# Altium PCB RF-36-S1 V2.PcbDoc
Units mm, origin at the board's own origin, x right, y up, seen from the top; angles counter-clockwise.
Board outline 80 x 80.71 mm, 2 copper layers (Top Layer, Bottom Layer); 70 components, 55 nets, 215 pads, 24 vias.
Unrouted connection lines stored in the file: 4.
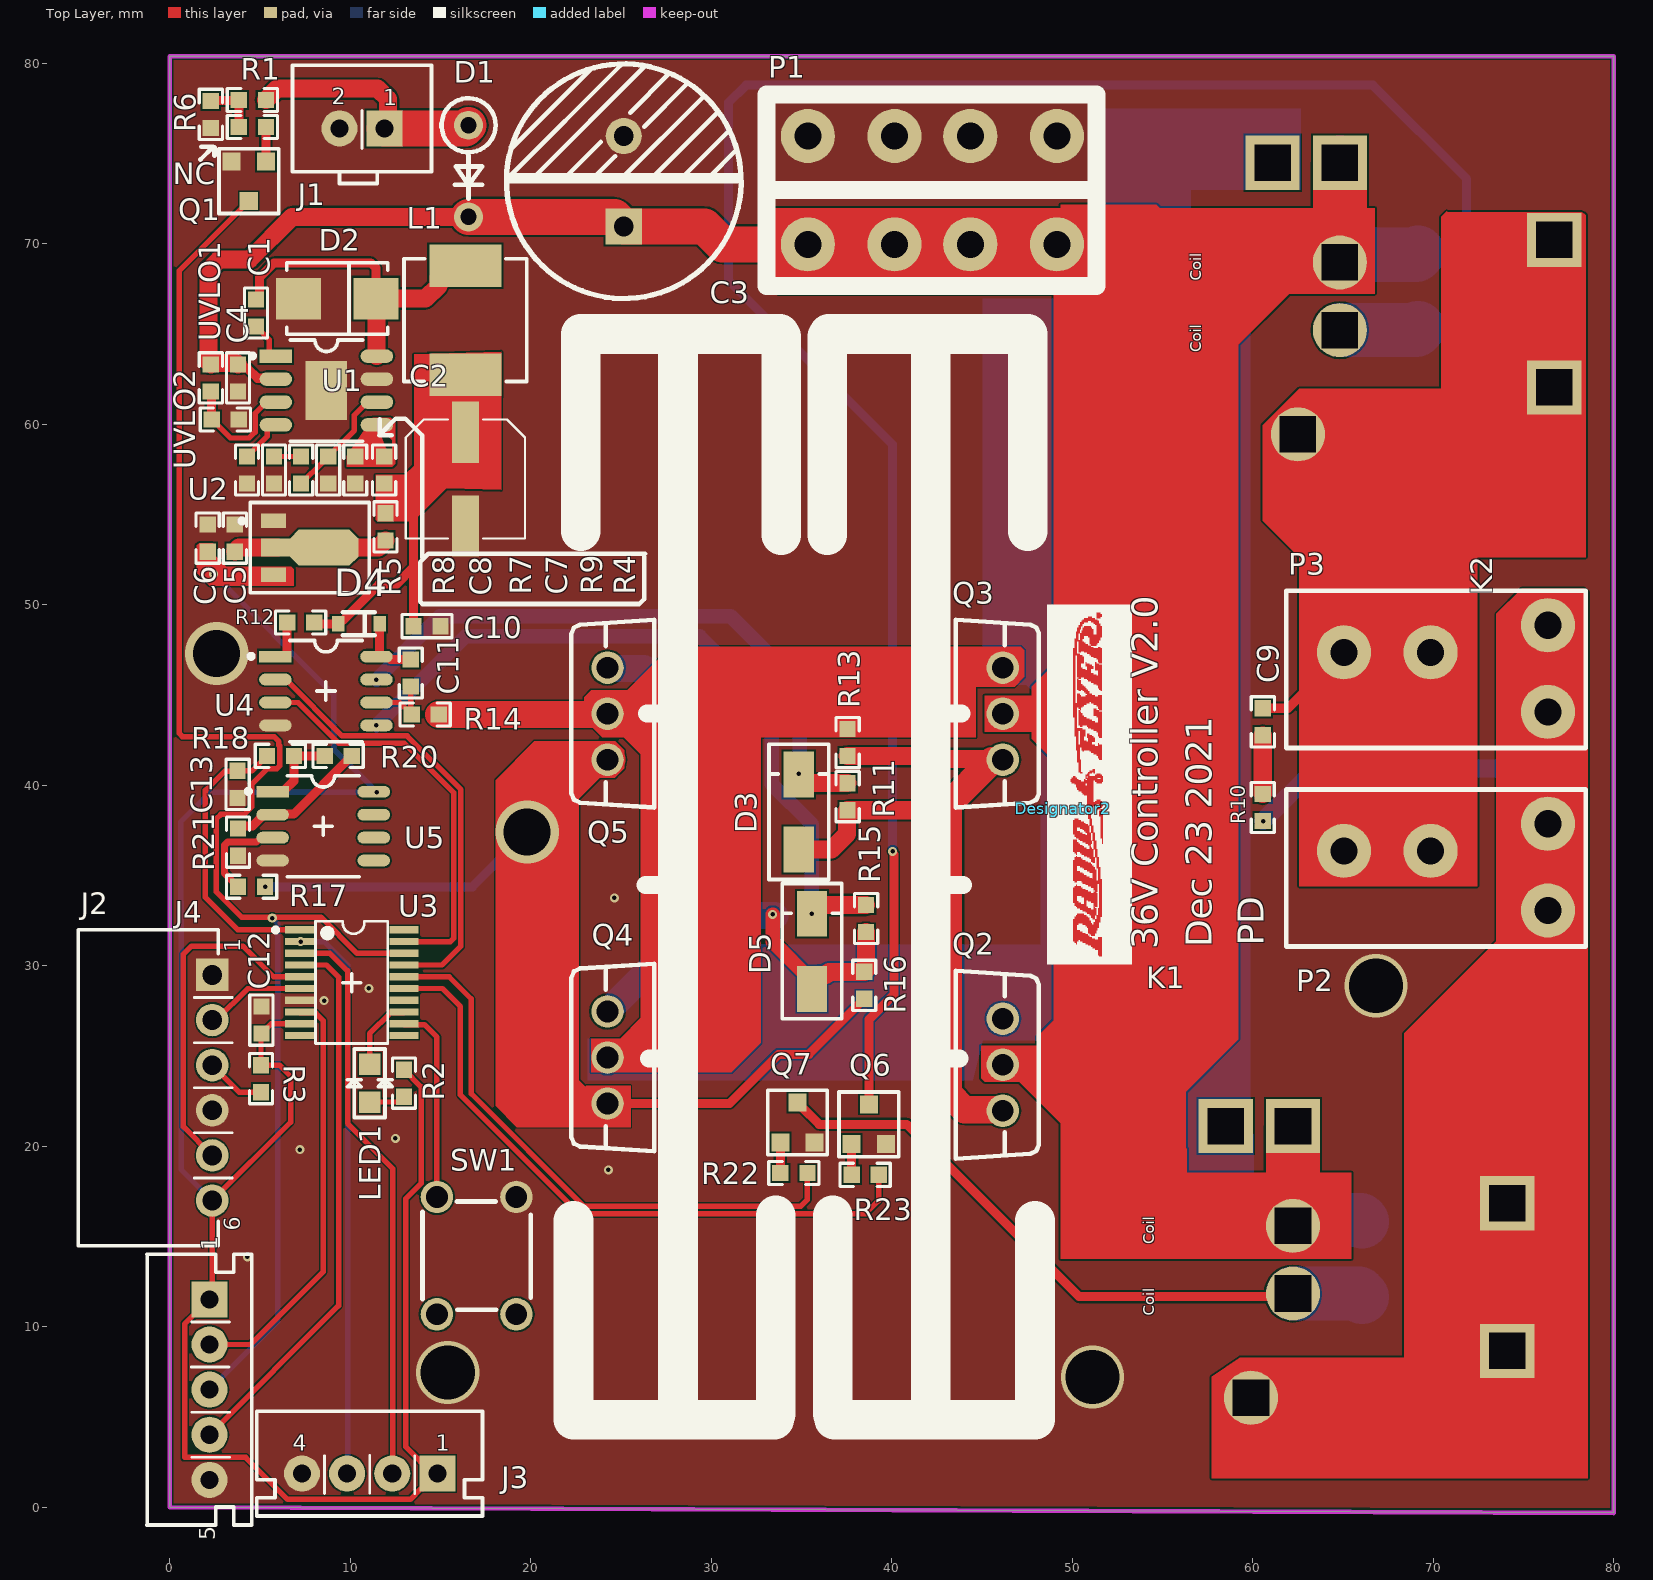
[diagram p0: Top Layer view]
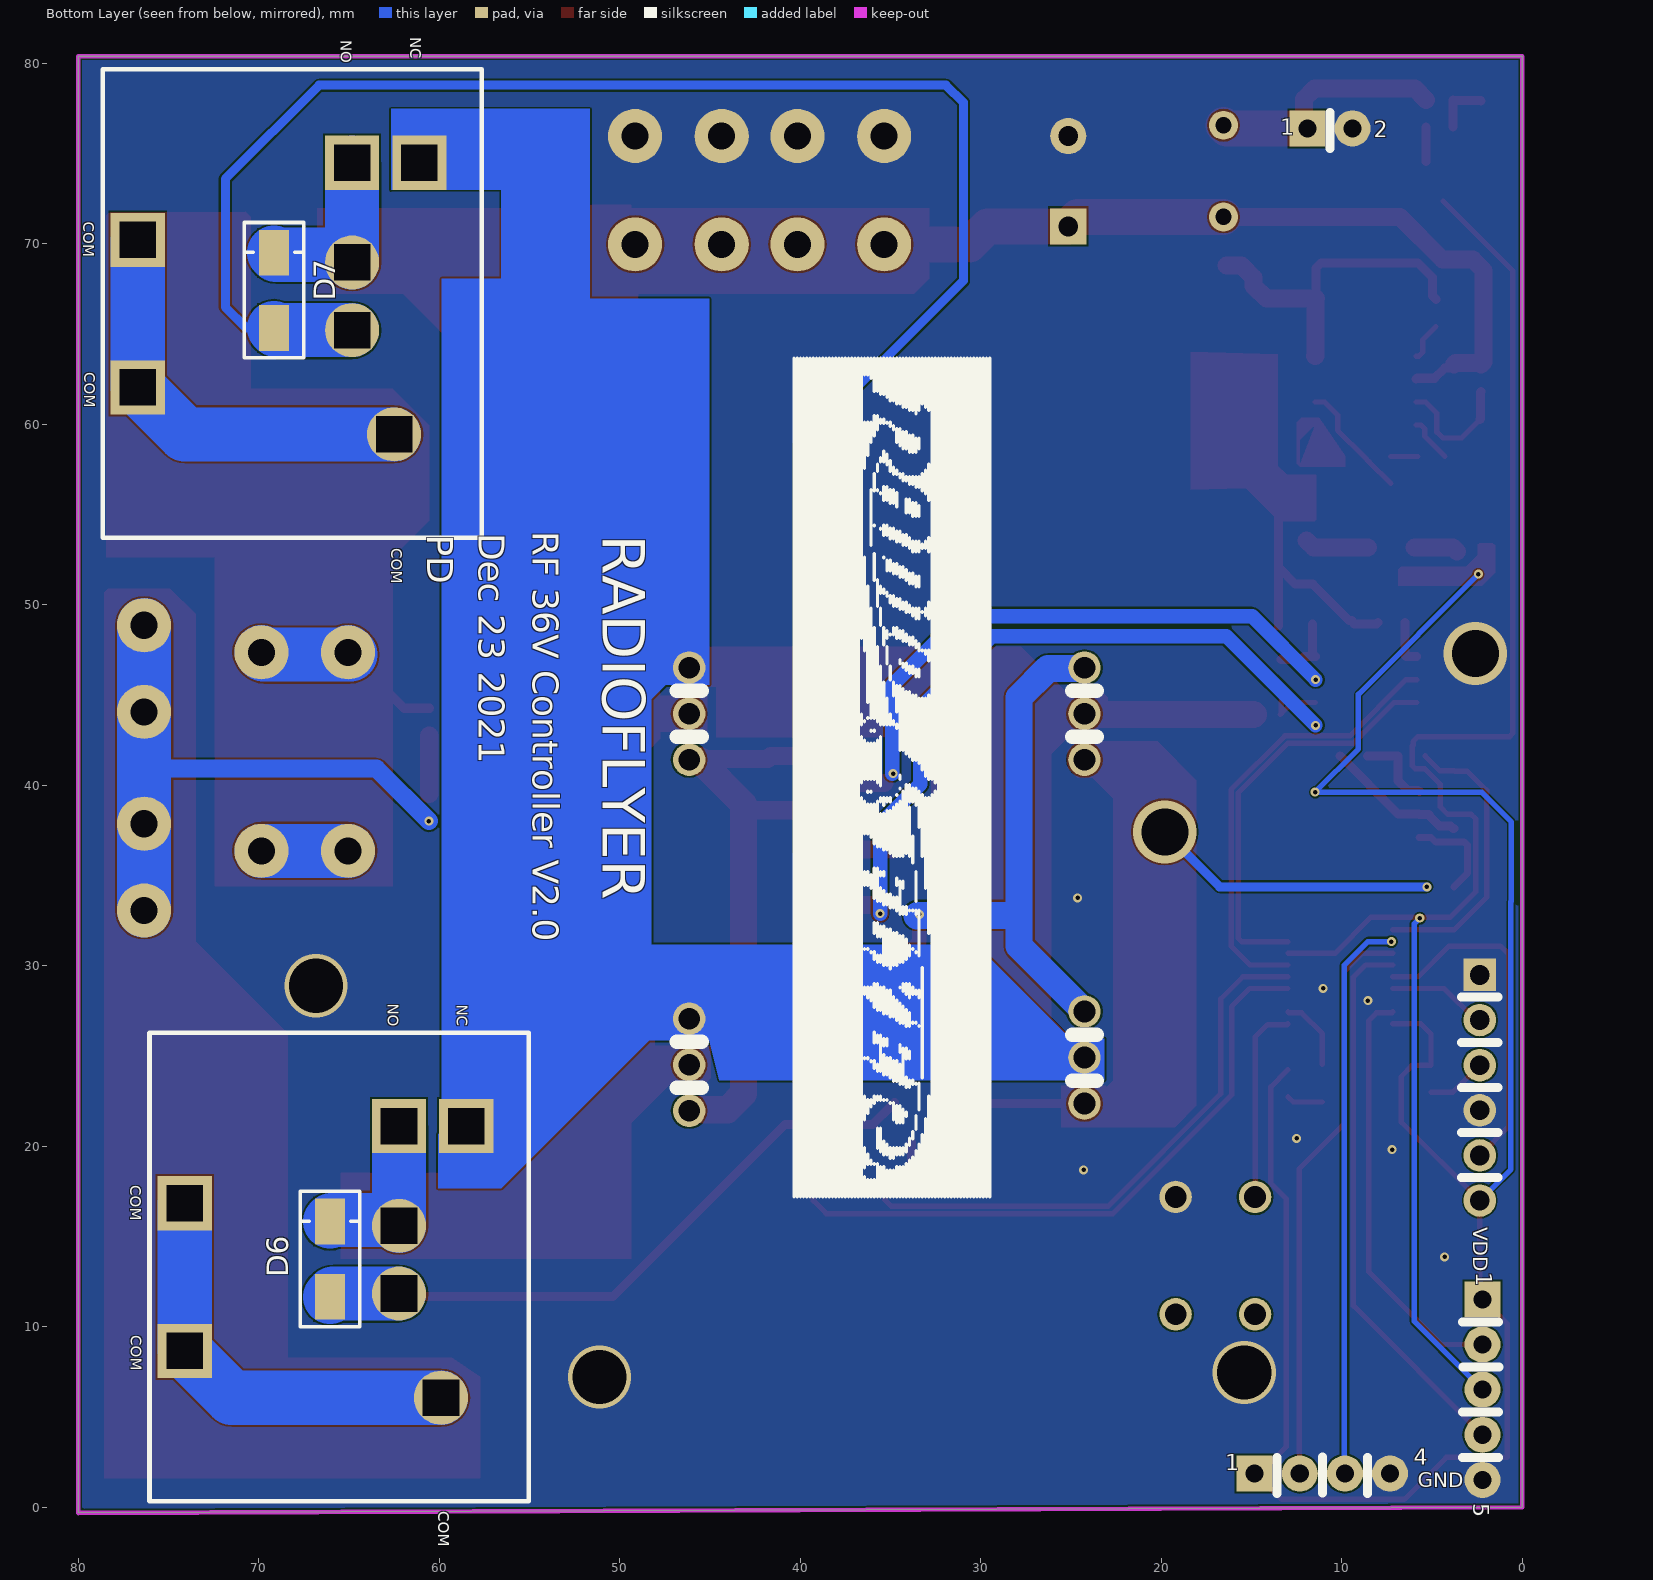
[diagram p1: Bottom Layer view, seen from below]
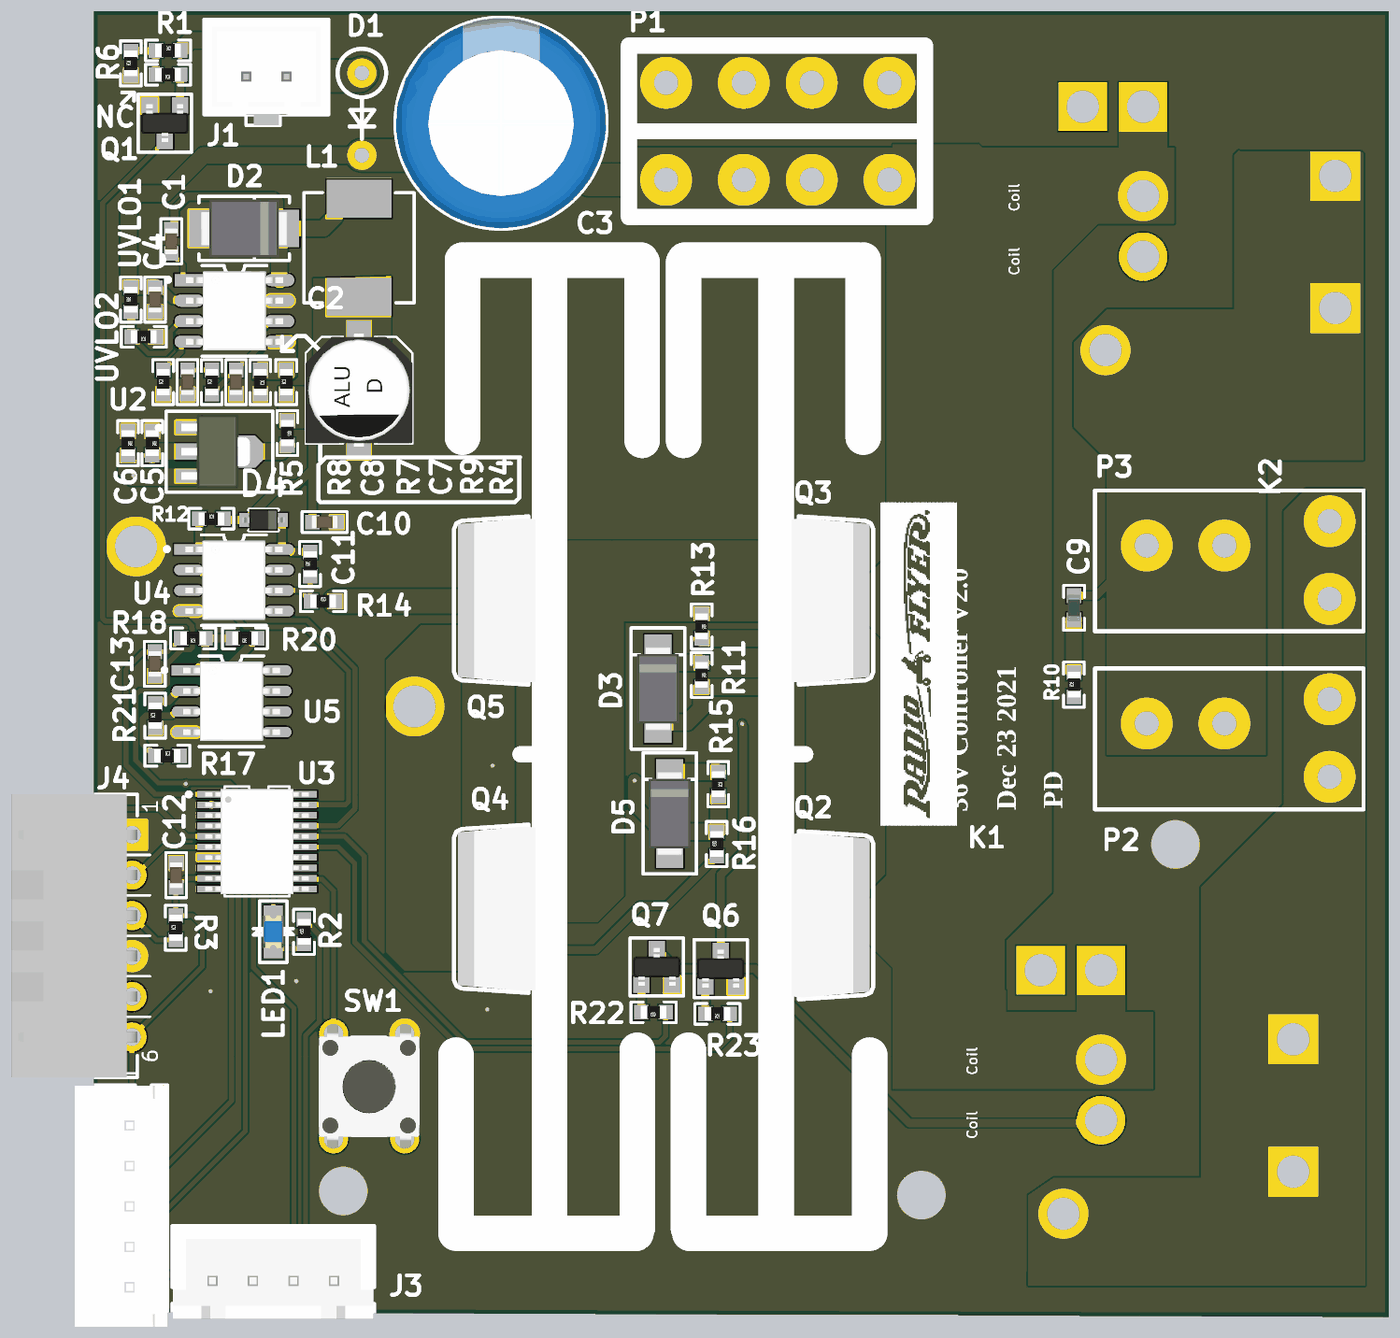
[diagram p2: 3D render of the assembled board from above, using the file's embedded part models]

## Layer stack, top to bottom
Top Solder: solder mask 0.0102, Solder Resist, Dk 3.5
Top Layer: signal copper 0.0356
Dielectric 1: dielectric 0.32, FR-4, Dk 4.8
Bottom Layer: signal copper 0.0356
Bottom Solder: solder mask 0.0102, Solder Resist, Dk 3.5

## Board outline
0,0 0,80.4 80,80.4 80,-0.308 79.999,-0.308

## Design rules (kind name [scope] priority, off if disabled: settings)
Clearance Clearance_13 [InNamedPolygon('gm') Or InNamedPolygon('NONET_L02_P007')] p1: gap=0.1 ignorepadtopadclearanceinfootprint=FALSE
Clearance Clearance_12 [InNamedPolygon('NONET_L02_P007')] p2: gap=0.3 ignorepadtopadclearanceinfootprint=FALSE
Clearance Clearance_11 [InNamedPolygon('NONET_L01_P003')] p3: gap=0.3 ignorepadtopadclearanceinfootprint=FALSE
Clearance Clearance_10 [InNamedPolygon('NONET_L01_P003')] p4: gap=0.3 ignorepadtopadclearanceinfootprint=FALSE
Clearance Clearance_9 [InNamedPolygon('NONET_L01_P003')] p5: gap=0.254 ignorepadtopadclearanceinfootprint=FALSE except(0: Arc-Hole Track-Hole SMDPad-Hole THPad-Hole Via-Hole Fill-Hole Poly-Hole Region-Hole Text-Hole)
Clearance Clearance_8 [InNamedPolygon('GND_L01_P000')] p6: gap=0.3 ignorepadtopadclearanceinfootprint=FALSE
Clearance Clearance_7 [InNamedPolygon('GND_L02_P002')] p7: gap=0.3 ignorepadtopadclearanceinfootprint=FALSE
Clearance Clearance_6 [InNamedPolygon('GND_L02_P002')] p8: gap=3 ignorepadtopadclearanceinfootprint=FALSE
Clearance Clearance_5 [InNamedPolygon('GND_L01_P000')] p9: gap=3 ignorepadtopadclearanceinfootprint=FALSE
Clearance Clearance_4 [InNamedPolygon('GND_L02_P002')] p10: gap=0.2 ignorepadtopadclearanceinfootprint=FALSE
Clearance Clearance_3 [InNamedPolygon('GND_L02_P002')] p11: gap=0.2 ignorepadtopadclearanceinfootprint=FALSE
Clearance Clearance_2 [InNamedPolygon('GND_L02_P002')] p12: gap=0.1 ignorepadtopadclearanceinfootprint=FALSE
Clearance Clearance_1 [InNamedPolygon('GND_L02_P002')] p13: gap=0.254 ignorepadtopadclearanceinfootprint=FALSE except(0: Arc-Hole Track-Hole SMDPad-Hole THPad-Hole Via-Hole Fill-Hole Poly-Hole Region-Hole Text-Hole)
Clearance [All] p14: gap=0.1 ignorepadtopadclearanceinfootprint=FALSE
PlaneConnect [All] p1: planeconnectstyle=Direct reliefexpansion=0.508 reliefentries=4 reliefconductorwidth=0.254 reliefairgap=0.254
PolygonConnect PolygonConnect_13 [All vs IsNamedPolygon('NONET_L02_P007')] p1: connectstyle=Direct reliefconductorwidth=0.254 reliefentries=4 polygonreliefangle="90 Angle" airgapwidth=0.254
PolygonConnect PolygonConnect_12 [All vs IsNamedPolygon('GND_L02_P002')] p2: thpad.connectstyle=Direct thpad.reliefconductorwidth=0.254 thpad.reliefentries=4 thpad.polygonreliefangle="90 Angle" thpad.airgapwidth=0.254 smdpad.connectstyle=Direct smdpad.reliefconductorwidth=0.254 smdpad.reliefentries=4 smdpad.polygonreliefangle="90 Angle" smdpad.airgapwidth=0.254 via.connectstyle=Relief via.reliefconductorwidth=0.254 via.reliefentries=4 via.polygonreliefangle="90 Angle" via.airgapwidth=0.254
PolygonConnect PolygonConnect_11 [All vs IsNamedPolygon('dr')] p3: thpad.connectstyle=Direct thpad.reliefconductorwidth=0.254 thpad.reliefentries=4 thpad.polygonreliefangle="90 Angle" thpad.airgapwidth=0.254 smdpad.connectstyle=Direct smdpad.reliefconductorwidth=0.254 smdpad.reliefentries=4 smdpad.polygonreliefangle="90 Angle" smdpad.airgapwidth=0.254 via.connectstyle=Relief via.reliefconductorwidth=0.254 via.reliefentries=4 via.polygonreliefangle="90 Angle" via.airgapwidth=0.254
PolygonConnect PolygonConnect_10 [All vs IsNamedPolygon('NONET_L01_P003')] p4: thpad.connectstyle=Direct thpad.reliefconductorwidth=0.254 thpad.reliefentries=4 thpad.polygonreliefangle="90 Angle" thpad.airgapwidth=0.254 smdpad.connectstyle=Direct smdpad.reliefconductorwidth=0.254 smdpad.reliefentries=4 smdpad.polygonreliefangle="90 Angle" smdpad.airgapwidth=0.254 via.connectstyle=Relief via.reliefconductorwidth=0.254 via.reliefentries=4 via.polygonreliefangle="90 Angle" via.airgapwidth=0.254
PolygonConnect PolygonConnect_9 [All vs IsNamedPolygon('NONET_L01_P003')] p5: thpad.connectstyle=Direct thpad.reliefconductorwidth=0.254 thpad.reliefentries=4 thpad.polygonreliefangle="90 Angle" thpad.airgapwidth=0.254 smdpad.connectstyle=Direct smdpad.reliefconductorwidth=0.254 smdpad.reliefentries=4 smdpad.polygonreliefangle="90 Angle" smdpad.airgapwidth=0.254 via.connectstyle=Relief via.reliefconductorwidth=0.254 via.reliefentries=4 via.polygonreliefangle="90 Angle" via.airgapwidth=0.254
PolygonConnect PolygonConnect_8 [All vs IsNamedPolygon('NONET_L01_P003')] p6: thpad.connectstyle=Direct thpad.reliefconductorwidth=0.254 thpad.reliefentries=4 thpad.polygonreliefangle="90 Angle" thpad.airgapwidth=0.254 smdpad.connectstyle=Direct smdpad.reliefconductorwidth=0.254 smdpad.reliefentries=4 smdpad.polygonreliefangle="90 Angle" smdpad.airgapwidth=0.254 via.connectstyle=Relief via.reliefconductorwidth=0.254 via.reliefentries=4 via.polygonreliefangle="90 Angle" via.airgapwidth=0.254
PolygonConnect PolygonConnect_7 [All vs IsNamedPolygon('NONET_L01_P003')] p7: thpad.connectstyle=Direct thpad.reliefconductorwidth=0.254 thpad.reliefentries=4 thpad.polygonreliefangle="90 Angle" thpad.airgapwidth=0.254 smdpad.connectstyle=Direct smdpad.reliefconductorwidth=0.254 smdpad.reliefentries=4 smdpad.polygonreliefangle="90 Angle" smdpad.airgapwidth=0.254 via.connectstyle=Relief via.reliefconductorwidth=0.254 via.reliefentries=4 via.polygonreliefangle="90 Angle" via.airgapwidth=0.254
PolygonConnect PolygonConnect_6 [All vs IsNamedPolygon('GND_L01_P000')] p8: thpad.connectstyle=Direct thpad.reliefconductorwidth=0.254 thpad.reliefentries=4 thpad.polygonreliefangle="90 Angle" thpad.airgapwidth=0.254 smdpad.connectstyle=Direct smdpad.reliefconductorwidth=0.254 smdpad.reliefentries=4 smdpad.polygonreliefangle="90 Angle" smdpad.airgapwidth=0.254 via.connectstyle=Relief via.reliefconductorwidth=0.254 via.reliefentries=4 via.polygonreliefangle="90 Angle" via.airgapwidth=0.254
PolygonConnect PolygonConnect_5 [All vs IsNamedPolygon('GND_L02_P002')] p9: thpad.connectstyle=Direct thpad.reliefconductorwidth=0.254 thpad.reliefentries=4 thpad.polygonreliefangle="90 Angle" thpad.airgapwidth=0.254 smdpad.connectstyle=Direct smdpad.reliefconductorwidth=0.254 smdpad.reliefentries=4 smdpad.polygonreliefangle="90 Angle" smdpad.airgapwidth=0.254 via.connectstyle=Relief via.reliefconductorwidth=0.254 via.reliefentries=4 via.polygonreliefangle="90 Angle" via.airgapwidth=0.254
PolygonConnect PolygonConnect_4 [All vs IsNamedPolygon('GND_L02_P002')] p10: thpad.connectstyle=Direct thpad.reliefconductorwidth=0.254 thpad.reliefentries=4 thpad.polygonreliefangle="90 Angle" thpad.airgapwidth=0.254 smdpad.connectstyle=Direct smdpad.reliefconductorwidth=0.254 smdpad.reliefentries=4 smdpad.polygonreliefangle="90 Angle" smdpad.airgapwidth=0.254 via.connectstyle=Relief via.reliefconductorwidth=0.254 via.reliefentries=4 via.polygonreliefangle="90 Angle" via.airgapwidth=0.254
PolygonConnect PolygonConnect_3 [All vs IsNamedPolygon('GND_L02_P002')] p11: thpad.connectstyle=Direct thpad.reliefconductorwidth=0.254 thpad.reliefentries=4 thpad.polygonreliefangle="90 Angle" thpad.airgapwidth=0.254 smdpad.connectstyle=Direct smdpad.reliefconductorwidth=0.254 smdpad.reliefentries=4 smdpad.polygonreliefangle="90 Angle" smdpad.airgapwidth=0.254 via.connectstyle=Relief via.reliefconductorwidth=0.254 via.reliefentries=4 via.polygonreliefangle="90 Angle" via.airgapwidth=0.254
PolygonConnect PolygonConnect_2 [All vs IsNamedPolygon('GND_L02_P002')] p12: thpad.connectstyle=Direct thpad.reliefconductorwidth=0.254 thpad.reliefentries=4 thpad.polygonreliefangle="90 Angle" thpad.airgapwidth=0.254 smdpad.connectstyle=Direct smdpad.reliefconductorwidth=0.254 smdpad.reliefentries=4 smdpad.polygonreliefangle="90 Angle" smdpad.airgapwidth=0.254 via.connectstyle=Relief via.reliefconductorwidth=0.254 via.reliefentries=4 via.polygonreliefangle="90 Angle" via.airgapwidth=0.254
PolygonConnect PolygonConnect_1 [All vs IsNamedPolygon('GND_L02_P002')] p13: thpad.connectstyle=Direct thpad.reliefconductorwidth=0.254 thpad.reliefentries=4 thpad.polygonreliefangle="90 Angle" thpad.airgapwidth=0.254 smdpad.connectstyle=Direct smdpad.reliefconductorwidth=0.254 smdpad.reliefentries=4 smdpad.polygonreliefangle="90 Angle" smdpad.airgapwidth=0.254 via.connectstyle=Relief via.reliefconductorwidth=0.254 via.reliefentries=4 via.polygonreliefangle="90 Angle" via.airgapwidth=0.254
PolygonConnect [All] p14: connectstyle=Direct reliefconductorwidth=0.254 reliefentries=4 polygonreliefangle="90 Angle" airgapwidth=0.254
RoutingVias [All] p1: holewidth=0.711 width=1.27 viastyle="Through Hole" minholewidth=0.711 minwidth=1.27 maxholewidth=0.711 maxwidth=1.27
SolderMaskExpansion [All] p1: expansion=0.102 istentingtop=FALSE
Width [All] p1: maxlimit=3 minlimit=0.1 preferedwidth=0.254
29 further rules are at their usual default settings.

## Components (designator, comment, footprint, x,y, rotation, side; value= is the part's Value field where it differs from the comment)
C1 "PXL456470-1530" CAPC0603-RW 4.775,66.175 r90 top value=0.1uF
C2 "PBE099540-1010" "CASE - D" 16.375,56.975 r90 top value=20uF
C3 "PVE599570-4710" CAP_Radial_D13L25P5.0 25.15,73.475 r270 top locked value=1000uF
C4 "PXL456470-1530" CAPC0603-RW 3.775,62.575 r270 top value=4.7uF
C5 "4.7uF" 0603-RW 3.6,53.7 r270 top
C6 "4.7uF" 0603-RW 2.1,53.7 r270 top
C7 "PXL456470-1530" CAPC0603-RW 8.775,57.475 r270 top value=68pF
C8 "PXL456470-1530" CAPC0603-RW 5.775,57.475 r270 top value=6.8nF
C9 "104" 0603 60.55,43.525 r270 top
C10 "PXL456470-1530" CAPC0603-RW 14.25,48.825 r0 top value=1uF
C11 "4.7uF" 0603-RW 13.35,46.23 r90 top
C12 "PXL456470-1530" CAPC0603-RW 5.075,27 r90 top value=4.7uF
C13 "PXL456470-1530" CAPC0603-RW 3.755,40.059 r270 top value=104
D1 "RAD114004-0010" DO-41-V-P5.08 16.55,76.575 r270 top
D2 "T571002930249" SMB 9.275,66.975 r0 top
D3 "SMAJ36A-13-F" SMA 34.85,38.525 r90 top
D4 "RCD114148-0020" SOD-323 10.475,48.95 r0 top
D5 "SMAJ36A-13-F" SMA 35.575,30.808 r90 top
D6 "SMAJ36A-13-F" SMA 66.05,13.75 r90 bottom
D7 "SMAJ36A-13-F" SMA 69.15,67.425 r90 bottom
Designator2 "Comment" "Top 150%" 49.5,38.725 r90 top
J1 "T690300125300" "CONN 2P PH=2.5mm HAA250A-2 WHITE" 10.65,76.4 r0 top value=2.5mm
J2 "T690300121600" "CONN 6P PH=2.5mm RA XHB-6AW-KL" 2.35,23.25 r90 top value=2.5mm
J3 "CCN250000-0104" "CONN 4P PH=2.5mm B4B-XH-A" 11.075,1.875 r0 top value=2.5mm
J4 "CCN250000-0105" "CONN 5P PH=2.5mm B5B-XH-A" 2.2,6.525 r90 top value=2.5mm
K1 "SLB4119" "RELAY SLB4119" 72.3,6.176 r90 top
K2 "SLB4119" "RELAY SLB4119" 74.9,59.551 r90 top
L1 "T621000090500" "IND CSAB0740" 16.375,65.775 r270 top value=22uH
LED1 "T575011290263" LED0805-Blue 11.075,23.5 r90 top
NC "T501348102129" 0603-RW 4.575,76.475 r180 top value=10ohm
P1 "CJP012009-0050" "Bat connector" 49.15,69.975 r180 top locked
P2 "CJP012009-0050" "Motor connector" 78.45,39.775 r270 top locked
P3 "CJP012009-0050" "Motor connector" 78.45,50.775 r270 top locked
Q1 "RCN000846-0001" SOT23-132-RW 4.375,73.475 r180 top
Q2 "RHM120060-1001" TO220-F 46.15,21.975 r90 top locked
Q3 "RHM120060-1001" TO220-F 46.15,41.425 r90 top locked
Q4 "RHM120060-1001" TO220-F 24.25,27.475 r270 top locked
Q5 "RHM120060-1001" TO220-F 24.25,46.525 r270 top locked
Q6 "RCN000846-0001" SOT23-132-RW 38.725,21.225 r0 top
Q7 "RCN000846-0001" SOT23-132-RW 34.775,21.325 r0 top
R1 "T501348102129" 0603-RW 4.575,77.975 r0 top value=22k
R2 "T501348102129" 0603-RW 12.975,23.5 r90 top value=1K
R3 "T501348102129" 0603-RW 5.05,23.75 r90 top value=101
R4 "T501348102129" 0603-RW 11.875,57.475 r90 top value=182K
R5 "T501348102129" 0603-RW 11.95,54.325 r270 top value=0ohm
R6 "T501348102129" 0603-RW 2.275,77.175 r90 top value=1k
R7 "T501348102129" 0603-RW 7.275,57.475 r90 top value=10.5K
R8 "T501348102129" 0603-RW 4.275,57.475 r90 top value=243K
R9 "T501348102129" 0603-RW 10.275,57.475 r270 top value=10.2K
R10 "T501348102129" 0603-RW 60.55,38.775 r90 top value=10R
R11 "T501348102129" 0603-RW 37.55,39.375 r270 top value=4.7R
R12 "T501348102129" 0603-RW 7.25,49.03 r0 top value=4.7R
R13 "T501348102129" 0603-RW 37.55,42.375 r270 top value=10K
R14 "T501348102129" 0603-RW 14.15,43.93 r0 top value=4.7R
R15 "T501348102129" 0603-RW 38.575,32.625 r270 top value=100R
R16 "T501348102129" 0603-RW 38.475,28.925 r90 top value=10K
R17 "T501348102129" 0603-RW 4.53,34.384 r0 top value=102
R18 "T501348102129" 0603-RW 6.13,41.634 r180 top value=1K
R20 "T501348102129" 0603-RW 9.33,41.634 r180 top value=21K
R21 "T501348102129" 0603-RW 3.78,36.859 r90 top value=1K
R22 "T501348102129" 0603-RW 34.575,18.525 r180 top value=2.2k
R23 "T501348102129" 0603-RW 38.525,18.425 r180 top value=2.2k
SW1 "MSWA06012-0010" TS_6X6X8_DIP 17,13.95 r90 top value=TACT
U1 "TPS54540" SO8-EP 8.675,61.875 r0 top
U2 "7805" SOT89 7.15,53.175 r270 top
U3 "RCI800336-0001" TSSOP20 10.075,29.075 r270 top
U4 "T610900027257" SO8 8.65,45.23 r0 top
U5 "RCI000358-0001" SO8 8.5,37.745 r0 top
UVLO1 "T501348102129" 0603-RW 2.275,62.575 r90 top value=1.676M
UVLO2 "T501348102129" 0603-RW 3.075,60.275 r180 top value=60K

## Footprints (in the part's own frame and the unit in brackets; to place one, negate y for a bottom-side part, rotate by r counter-clockwise, add the part's x,y. Pads: shape width x height; smd on the part's side, far side on the other; paste and mask are expansions set on the pad)
0603 [mm]
  rect 0.9x0.9 smd: 1(-0.75,0) 2(0.75,0)
  silkscreen extent -1.39,-0.63 1.39,0.65, body extent -0.8,-0.4 0.8,0.4, height 0.8
0603-RW [mm]
  rect 0.9x0.9 smd mask+0.05: 1(-0.75,0) 2(0.75,0)
  silkscreen extent -1.39,-0.64 1.39,0.64, body extent -0.8,-0.41 0.8,0.39, height 0.3
"Bat connector" [mm]
  round 3 hole 1.5: 1(0,0) 1(4.8,0) 1(9,0) 1(13.8,0) 2(0,-6) 2(4.8,-6) 2(9,-6) 2(13.8,-6)
  silkscreen extent -2.2,-8.3 16.1,2.3
CAP_Radial_D13L25P5.0 [mm] "Body: Dia. 14mm(Max,),Height:26.5mm(max),Pitch:5mm"
  rect 2x2 hole 1.1 mask+0.05: 1(2.5,0)
  round 2 hole 1.1 mask+0.05: 2(-2.5,0)
  silkscreen extent -6.5,-6.5 6.5,6.5, body extent -6.5,-6.49 6.5,6.49, height 25
CAPC0603-RW [mm] "Body size:  L1.6XW0.8XT0.8mm"
  rect 0.9x0.9 smd mask+0.05: 1(-0.75,0) 2(0.75,0)
  silkscreen extent -1.39,-0.64 1.39,0.64, body extent -0.8,-0.4 0.8,0.4, height 0.8
"CASE - D" [mm] "CHIP ELECT CAP D6.3mm * H5.4mm"
  rect 3.4x1.5 smd mask+0.05: 1(2.6,0) 2(-2.6,0)
  silkscreen extent -3.3,-3.3 3.3,3.3, body extent -3.5,-3.3 3.5,3.3, height 5.4
"CONN 2P PH=2.5mm HAA250A-2 WHITE" [mm] "CONN 2P PH=2.5mm HAA250A-2 WHITE"
  rect 2x2 hole 1: 1(1.25,0)
  round 2 hole 1: 2(-1.25,0)
  silkscreen extent -3.85,-3.05 3.85,3.5, body extent -3.75,-3.05 3.75,3.5, height 7.4
"CONN 4P PH=2.5mm B4B-XH-A" [mm] "CONN 4P PH=2.5mm B4B-XH-A H7mm"
  rect 2x2 hole 1: 1(3.75,0)
  round 2 hole 1: 2(1.25,0) 3(-1.25,0) 4(-3.75,0)
  silkscreen extent -6.25,-2.35 6.25,3.46, body extent -6.2,-2.3 6.2,3.45, height 7
"CONN 5P PH=2.5mm B5B-XH-A" [mm] "CONN 5P PH=2.5mm B5B-XH-A H7mm"
  rect 2x2 hole 1: 1(5,0)
  round 2 hole 1: 2(2.5,0) 3(0,0) 4(-2.5,0) 5(-5,0)
  silkscreen extent -7.5,-2.35 7.5,3.47, body extent -7.45,-2.35 7.45,3.4, height 7
"CONN 6P PH=2.5mm RA XHB-6AW-KL" [mm] "WAFER 6P XHB-6AW-KL"
  rect 1.8x1.8 hole 1.1: 1(6.25,0)
  round 1.8 hole 1.1: 2(3.75,0) 3(1.25,0) 4(-1.25,0) 5(-3.75,0) 6(-6.25,0)
  silkscreen extent -8.75,-1.11 8.75,7.43, body extent -8.75,-0.31 8.75,7.42, height 6.56
DO-41-V-P5.08 [mm]
  round 1.6 hole 0.91: 1(0,0) 2(5.08,0)
  silkscreen extent -1.5,-1.5 4.06,1.5, body extent -1.42,-1.4 5.53,1.4, height 7.45
"IND CSAB0740" [mm] "6.6mmX6.6mm H3.8mm"
  rect 2.35x4 smd: 1(-3.025,0) 2(3.025,0)
  silkscreen extent -3.4,-3.4 3.4,3.4, body extent -3.5,-3.4 3.5,3.4, height 3.8
LED0805-Blue [mil]
  rect 47x47 smd mask+1.97: 1(-41,0) 2(41,0)
  silkscreen extent -75,-48 75,48, body extent -40,-25 40,24, height 43
"Motor connector" [mm]
  round 3 hole 1.5: 1(1.9,-2.1) 1(6.7,-2.1) 2(3.4,-8.6) 2(3.4,-13.4)
  silkscreen extent 0,-16.6 8.7,0
"RELAY SLB4119" [mm] "HFD23\012-1ZS"
  rect 3x3 hole 2 square mask+0.05: 1(14.949,10.075) 2(14.949,13.8) 6(2.499,-1.8) 7(10.674,-1.8)
  round 3 hole 2 square mask+0.05: 3(9.424,10.075) 4(5.674,10.075) 5(-0.101,12.4)
  body extent -5.47,-3.55 20.46,17.45, height 0.25
SMA [mm] "SMA Body W 2.90mm L 4.60mm Max"
  rect 2.54x1.676 smd: 1(-2.083,0) 2(2.083,0)
  silkscreen extent -3.73,-1.65 3.76,1.65, body extent -2.6,-1.3 2.6,1.3, height 2.4
SMB [mm] "SMB Body W 3.94mm L 4.70mm Max"
  rect 2.5x2.3 smd: 1(-2.15,0) 2(2.15,0)
  silkscreen extent -2.79,-1.98 2.79,1.98, body extent -2.7,-1.8 2.7,1.8, height 2.27
SO8 [mm] "SO8 8Pin Pitch 1.27mm Body 4.9mm X 3.9mm"
  rect 1.8x0.65 smd: 1(-2.8,1.905)
  oval 1.8x0.65 smd: 2(-2.8,0.635) 3(-2.8,-0.635) 4(-2.8,-1.905) 5(2.8,-1.905) 6(2.8,-0.635) 7(2.8,0.635) 8(2.8,1.905)
  silkscreen extent -4.25,-2.8 2,2.8, body extent -3,-2.45 3,2.45, height 1.75
SO8-EP [mm] "SO8 8Pin Exposed Pad, Pitch 1.27mm Body 4.9mm X 3.9mm"
  rect 2.3x3.25 smd: 0(0,0)
  rect 1.8x0.75 smd: 1(-2.8,1.905)
  oval 1.8x0.75 smd: 2(-2.8,0.635) 3(-2.8,-0.635) 4(-2.8,-1.905) 5(2.8,-1.905) 6(2.8,-0.635) 7(2.8,0.635) 8(2.8,1.905)
  silkscreen extent -4.2,-2.8 2,2.8, body extent -3,-2.45 3,2.45, height 1.75
SOD-323 [mm] "SMD Body W 1.4mm L 1.8mm"
  rect 0.7x0.85 smd: 1(-1.15,0) 2(1.15,0)
  silkscreen extent -0.89,-0.64 0.89,0.64, body extent -1.3,-0.67 1.3,0.68, height 1.1
SOT23-132-RW [mm]
  rect 1x1 smd: 1(-0.95,-1.1) 2(0.95,-1.1) 3(0,1.1)
  silkscreen extent -1.65,-1.79 1.65,1.79, body extent -1.46,-1.17 1.46,1.17, height 1
SOT89 [mm]
  rect 0.8x1.4 smd: 1(-1.5,-1.4) 3(1.5,-1.4)
  oct 2x3.8 smd: 2(0,1.4)
  rect 1x1.854 smd: 2(0,-1.173)
  silkscreen extent -2.5,-3.25 2.5,3.9, body extent -2.31,-1.76 2.29,2.49, height 1.59
TO220-F [mm]
  round 1.8 hole 1.2: 1(0,0) 2(2.55,0) 3(5.1,0)
  silkscreen extent -2.65,-2 7.75,2.6, body extent -2.53,-1.76 7.63,3.04, height 21.3
"Top 150%" [mm]
  silkscreen extent -8.63,-3.78 11.28,0.87
TS_6X6X8_DIP [mm] "TACT Switch DIP Body  L6*W6*H8mm"
  round 1.8 hole 1.2 mask+0.05: 1(-3.25,2.2) 2(3.25,2.2) 3(-3.25,-2.2) 4(3.25,-2.2)
  silkscreen extent -3,-3 3,3, body extent -3.98,-3.1 3.94,3.1, height 8
TSSOP20 [mm] "TSSOP,Exposed Paddle,0.65mm,pitch;20 pin,4.60mm W X 6.6mm L X 1.20mm H body"
  rect 0.4x1.6 smd: 1(-2.925,-2.9) 2(-2.275,-2.9) 3(-1.625,-2.9) 4(-0.975,-2.9) 5(-0.325,-2.9) 6(0.325,-2.9) 7(0.975,-2.9) 8(1.625,-2.9) 9(2.275,-2.9) 10(2.925,-2.9) 11(2.925,2.9) 12(2.275,2.9) 13(1.625,2.9) 14(0.975,2.9) 15(0.325,2.9) 16(-0.325,2.9) 17(-0.975,2.9) 18(-1.625,2.9) 19(-2.275,2.9) 20(-2.925,2.9)
  silkscreen extent -3.4,-4.32 3.37,2, body extent -3.25,-3.2 3.25,3.2, height 1.1

## Part data
C1: library part "CAP0603 0.015uF 50V 10%", "GP CHIP CAP 0.015uF 50V 10% 0603 TYPE X7R", PACKAGE=CAPC0603, Tolerance=10%, Voltage=10V, Customer Specific=N/A, DIP&SMD=SMD, Other=X7R, SAP=T542021537508, Type=Capacitor, Vendor Code=10010262, Vendor Name=东莞市晴远电子有限公司
C2: library part "CAP E 100uF 16V 20% SMD", "CHIP ELECT 100uF 16V 20% SMD 6.3x5.4mm", PACKAGE="CASE - D", Tolerance=20%, Voltage=16V, Customer Specific=N/A, DIP&SMD=SMD, SAP=T551101434030, Type=Capacitor, Vendor Code=10020343, Vendor Name=深圳市春明电子有限公司
C3: library part "CAP E Aluminum 470uF 50V 20% - PVE599570-4710", "COND ELECT 470uF 50V 20% 105 13x25mm", PACKAGE=470uF/50V, Tolerance=20%, Voltage=50V, Customer Specific=N/A, DIP&SMD=DIP, MFG=佳维诚, SAP=T552471464020, Type=Capacitor, Vendor Code=10020154, Vendor Name=惠州市佳维诚电子有限公司
C4: library part "CAP0603 0.015uF 50V 10%", "GP CHIP CAP 0.015uF 50V 10% 0603 TYPE X7R", PACKAGE=CAPC0603, Tolerance=10%, Voltage=50V, Customer Specific=N/A, DIP&SMD=SMD, Other=X7R, SAP=T542021537508, Type=Capacitor, Vendor Code=10010262, Vendor Name=东莞市晴远电子有限公司
C5 C6 C9 C11: library part C
C7 C8: library part "CAP0603 0.015uF 50V 10%", "GP CHIP CAP 0.015uF 50V 10% 0603 TYPE X7R", PACKAGE=CAPC0603, Tolerance=10%, Voltage=3V, Customer Specific=N/A, DIP&SMD=SMD, Other=X7R, SAP=T542021537508, Type=Capacitor, Vendor Code=10010262, Vendor Name=东莞市晴远电子有限公司
C10: library part "CAP0603 0.015uF 50V 10%", "GP CHIP CAP 0.015uF 50V 10% 0603 TYPE X7R", PACKAGE=CAPC0603, Tolerance=10%, Voltage=16V, Customer Specific=N/A, DIP&SMD=SMD, Other=X7R, SAP=T542021537508, Type=Capacitor, Vendor Code=10010262, Vendor Name=东莞市晴远电子有限公司
C12 C13: library part "CAP0603 0.015uF 50V 10%", "GP CHIP CAP 0.015uF 50V 10% 0603 TYPE X7R", PACKAGE=CAPC0603, Tolerance=10%, Voltage=6V, Customer Specific=N/A, DIP&SMD=SMD, Other=X7R, SAP=T542021537508, Type=Capacitor, Vendor Code=10010262, Vendor Name=东莞市晴远电子有限公司
D1: library part 1N4004S, "GP DIODE  1N4004 1A 280VRMS DO-41", Current=1A, PACKAGE=DO-41, Voltage=400V, Customer Specific=N/A, DIP&SMD=DIP, MFG=PANJIT, MFG Part=1N5401, SAP=T571002250423, Type=DIODE, Vendor Code=10020343, Vendor Name=深圳市春明电子有限公司
D2: library part "DIO ER3DB", "DIODE 200V 3A ER3DB M.C.C K", Current=3A, PACKAGE=SMB, Voltage=50V~1000V, CREATE_NAME=cherry, CREATE_TIME=20190104, Customer Specific=N/A, DIP&SMD=SMD, MFG=MCCSEMI, MFG Part=ER3AB-ER3MB(SMB), SAP=T571002930249, Type=DIODE
D3 D5 D6 D7: PACKAGE=SMA, CREATE_NAME=Nathan, CREATE_TIME=16-Oct-2020, Customer Specific=N/A, DIP&SMD=SMD, MFG=DIODE, MFG Part=SMAJ36A-13-F, Type=DIODE
D4: library part 1N4148WS, "DIODE SW 1N4148 VF=0.7V SOD-323", Current=150MA, PACKAGE=SOD-323, Voltage=100V, Customer Specific=N/A, DIP&SMD=SMD, MFG="TW SEMICONDUCTOR", MFG Part=1N4148WS, SAP=T572005070208, Type=DIODE
J1: library part "CONN 2P PH=2.5mm HAA250A-2 BLACK", "CONNECTOR HA2.5 2PIN BLACK K", Current=3A, CREATE_NAME=Nathan, CREATE_TIME=24-Nov-2017, DIP&SMD=DIP, MFG=金瑞康, MFG Part="HAA250A-2 BLACK", SAP=T690300125300, Type=Connector
J2: library part "CONN PH 6P PH=2.5mm RA XHB-6AW-KL", "CONNECTOR 6PIN P=2.5 WHITE 90 K", CREATE_NAME=Nathan, CREATE_TIME=27-Sep-2017, DIP&SMD=DIP, MFG=金佳电子, MFG Part=XHB-6AW-KL, SAP=T690300121600, Type=Connector
J3: library part "CONN 4P PH=2.5mm B4B-XH-A", "GP CONNECTOR B4B-XH-A 4 PIN", Current=3A, DIP&SMD=DIP, SAP=T690300029000, Type=Connector, Vendor Code=10009989, Vendor Name=亿源电子有限公司
J4: library part "CONN 5P PH=2.5mm B5B-XH-A", "CONNECTOR B5B-XH-A 5 PIN", Current=3A, DIP&SMD=DIP, SAP=T690300029100, Type=Connector, Vendor Code=10020373, Vendor Name=深圳市利民丰电子有限公司
K1 K2: library part "Relay SLB4119 7P"
L1: library part "IND 22uH CSAB0740-220M", "22UH 4A 100K SMD CODACA CSAB074 K", Current=4A, Tolerance=20%, CREATE_NAME=Nathan, CREATE_TIME=30-Aug-2019, Customer Specific=N/A, DCR="125 mohm (max.)", DIP&SMD=SMD, MFG=CODACA, MFG Part=CSAB0740-220M, SAP=T621000090500, Type=INDUCTOR
LED1: library part LED0805B-H-0805AW61B008-Z2, "LED 750 2.0X1. H-0805AW61B0 HONGBRIG G", Color="Ice Blue", PACKAGE=0805, CREATE_NAME=Nathan, CREATE_TIME=31-OCT-2016, DIP&SMD=SMD, MFG="HONGBRIGHT (弘亮光電)", MFG Part=H-0805AW61B008-Z2, SAP=T575011290263, Type=LED
NC R1 R2 R3 R4 R5 R6 R7 R8 R9 R10 R11 R12 R13 R14 R15 R16 R17 R18 R20 R21 R22 R23 UVLO1 UVLO2: library part "RES0603 1/16W 0.1% 3.48K OHM", "CHIP 3.48K OHM 50PPM +-0.1% 0603 WALS L", PACKAGE=0603, Power="1/16 W", CREATE_NAME=Tom, CREATE_TIME=12-Apr-2016, Customer Specific=N/A, DIP&SMD=SMD, MFG=WALSIN, MFG Part=WF06T3481BTL, SAP=T501348102129, TOL=0.1%, Type=Resistor
P1 P2 P3: library part "AC INLET 2P DB8-6S1 N-Polar", "AC SOCKET 2P D2.36 2.5A 250V VDE BLACK", Current=5A, DIP&SMD=DIP, MFG=金明浩, MFG Part="DB8-6S1 N-Polar", SAP=T690300011500, Type=Connector, Vendor Code=10010007, Vendor Name=深圳市金明浩电子科技有限公司
Q1 Q6 Q7: library part LBC846BLT1G, "NPN LRC BC846BLT1G SOT23", PACKAGE=SOT-23, Customer Specific=N/A, DIP&SMD=SMD, MFG=LRC, MFG Part=2N5551, SAP=T581003640437, Type=NPN, Vendor Code=10009129, Vendor Name="WING HING ENTERPRISE CO"
Q2 Q3 Q4 Q5: library part 12N60L-A-TF3-T, "MOSFET 3PIN 12N60L-A -TF3-T TO-220F", Current=12A, PACKAGE=TO220, Voltage=600V, Customer Specific=N/A, DIP&SMD=DIP, MFG=UTC, MFG Part=12N60L-A-TF3-T, SAP=T586002570924, Type=MOSFET, Vendor Code=10020223, Vendor Name=丰富利科技（深圳）有限公司
SW1: library part "TACT SW H8.0 DIP", "TACT SWITC 4P L6*W6*H8mm", DIP&SMD=DIP, Force=250gf, MFG="ShenZhen GanHad", MFG Part=TS-06V-8HM, SAP=T670200001500, Type=Switch
U1: "4.5-42V input 5A output"
U3: library part N76E003, "IC MCU 20P TSSOP20", CREATE_NAME=GordonL@Deftronics, CREATE_TIME=23-Mar-2014, Customer Specific=N/A, DIP&SMD=SMD, MFG=ST, MFG Part=STM8S003F3P6, SAP=T610300083725, Type=IC
U4: library part 2ED2106S06F, "DRIVER 2ED2106S06F DSO-8 INFINEO K", CREATE_NAME=Nathan, CREATE_TIME=14-Apr-2020, Customer Specific=N/A, DIP&SMD=SMD, MFG=Infineon, MFG Part=EG2106, SAP=T610900027257, Type=IC
U5: library part LM358AM, "IC OP-AMP Dual LM358 DUAL OP-AMP SOIC8", Customer Specific=N/A, DIP&SMD=SMD, MFG="National SEMI", MFG Part=LM358AM, SAP=T610500008001, Type="IC AMP", Vendor Code=10020355, Vendor Name="SERIAL MICROELECTRONICS (HK) LIMITE"

## Via types
v1: diameter 0.5, hole 0.25, Top Layer to Bottom Layer, tented bottom, 19 vias
v2: diameter 3.5, hole 3, Top Layer to Bottom Layer, tented bottom, 3 vias
v3: diameter 3.5, hole 2.6, Top Layer to Bottom Layer, 2 vias

## Nets (pads, with @x,y where several pads share a name; then routed paths per layer and width w, separated by ;. In a path a pad name is that pad's centre, name@x,y a point inside that pad or via, vN(x,y) a via of type N, cw(c..) or ccw(c..) an arc to the next point about the centre after c; other vN are vias at no path point)
15V: C2.1 C10.1 D4.1 L1.2 R4.1 R5.1 R12.2 | length 15.6
  Top Layer w0.5: R12.2 8.08,48.95 D4.1 ; D4.1@9.425,49.125 9.575,49.125 11.6,51.15 12.575,51.15 13.5,52.075 ; R5.1 13.207,55.075 13.5,54.782 13.5,52.075 ; C10.1 13.5,52.075
  Top Layer w1: C2.1@16.125,58.375 16.375,58.625 C2.1
A_SEN: C13.1 R18.2 U3.1 | length 16.1
  Top Layer w0.3: R18.2 4.555,40.809 C13.1 3.727,40.781 3.031,40.781 1.975,39.725 1.975,33.8 3.775,32 U3.1
B: D7.1 K2.4 Q6.3 | length 117.8
  Top Layer w0.5: Q6.3 38.725,27.03 40.125,28.43 v1@40.125,36.175
  Bottom Layer w0.5: v1(40.05,36.35) 40.05,58.875 30.95,67.975 30.95,77.825 31.925,78.8 66.65,78.8 71.85,73.6 71.85,66.5 70.692,65.342 D7.1
  Bottom Layer w3: K2.4 69.033,65.225 D7.1
BW: R23.1 U3.15 | length 36.1
  Top Layer w0.3: U3.15 15.1,28.75 16.1,27.75 16.1,22.85 22.675,16.275 38.55,16.275 39.275,17 R23.1
Err_IDC: LED1.2 U3.13 | length 4.1
  Top Layer w0.3: LED1.2 11.075,26.254 12.221,27.4 12.925,27.4 U3.13
F: D6.1 K1.4 Q7.3 | length 35.9
  Top Layer w0.5: Q7.3 35.025,22.175 35.975,21.225 40.825,21.225 50.375,11.675 62.05,11.675 K1.4
  Bottom Layer w3: K1.4 65.867,11.85 D6.1
FW: R22.1 U3.16 | length 32.3
  Top Layer w0.3: U3.16 15.475,29.4 16.7,28.175 16.7,22.925 22.95,16.675 34.95,16.675 35.325,17.05 R22.1
GND: C2.2 C3.2 C4.2 C5.1 C6.1 C7.2 C8.2 C10.2 C12.2 C13.2 D2.1 J1.2 J2.1 J2.4 J3.4 J4.5 P1.2 Q1.2 Q6.2 Q7.2 R6.1 R8.1 R9.2 R21.1 SW1.4 U1.0 U1.7 U2.1 U3.7 U4.4 U5.4 UVLO2.1
  other v1: 4.3,13.875 24.3,18.7 7.2,19.825 12.5,20.45 8.554,28.083 11.025,28.75 24.625,33.775
  other v2: 51.125,7.225 15.4,7.475 66.825,28.9
  other v3: 2.597,47.313
H/L/BRK: J2.5 U3.5 | length 19.1
  Top Layer w0.3: J2.5 0.75,21.1 0.75,30.649 1.201,31.101 4.049,31.101 5.75,29.4 U3.5
Hall: J2.2 U3.6 | length 5.5
  Top Layer w0.3: J2.2 2.569,27 4.319,28.75 U3.6
HI: U3.17 U4.2 | length 25.1
  Top Layer w0.3: U4.2 6.425,45.865 9.54,42.75 13.15,42.75 16.125,39.775 16.125,31.101 15.074,30.05 U3.17
HO: D3.2 R11.1 U4.7 | length 34.3
  Top Layer w0.3: D3.2 D3.2@35.333,40.125
  Top Layer w1: D3.2@35.333,40.125 R11.1
  Bottom Layer w0.8: v1(11.45,45.865) 14.96,49.375 31.075,49.375 34.9,45.55 v1@34.9,40.65
  other v1: 34.85,40.65
LI: U3.19 U4.3 | length 22.8
  Top Layer w0.3: U4.3 7.105,44.595 9.366,42.334 13,42.334 15.725,39.609 15.725,31.526 15.549,31.35 U3.19
LO: D5.2 R15.1 U4.5 | length 41.2
  Top Layer w1: v1(35.575,32.891) 35.575,33.037 35.913,33.375 R15.1
  Bottom Layer w0.8: v1(11.45,43.325) 16.4,48.275 29.35,48.275 33.35,44.275 33.35,40.071 35.575,37.846 v1(35.575,32.891)
M1: K1.5 K1.6 K1.7 P2.1 P3.1 R10.1 | length 56.2
  Bottom Layer w1: v1(60.575,38.025) 63.475,40.925 76.35,40.925
  Bottom Layer w3: K1.5 71.5,6.075 K1.6 K1.7 ; P2.1@76.35,33.075 76.35,37.875 76.35,40.925 76.35,44.075 P3.1@76.35,48.875
M2: C9.1 K2.5 K2.6 K2.7 P2.2 P3.2 | length 39.2
  Top Layer w0.5: C9.1 61.95,44.275 P3.2@65.05,47.375
  Bottom Layer w3: K2.5 74.1,59.45 K2.6 K2.7 ; P2.2@65.05,36.375 P2.2@69.85,36.375 ; P3.2@65.05,47.375 64.925,47.25 69.725,47.25 P3.2@69.85,47.375
MOS_DET: U3.20
NetC1_1: C1.1 U1.1 | length 2.2
  Top Layer w0.3: C1.1 5.499,64.701 5.499,64.005 5.724,63.78 U1.1
NetC1_2: C1.2 D2.2 L1.1 U1.8 | length 19.1
  Top Layer w0.5: C1.2 4.975,67.125 4.975,68.15 5.775,68.95 11.132,68.95 11.425,68.657 D2.2
  Top Layer w1: U1.8 11.45,63.805 11.45,66.949 D2.2 14.175,66.975 14.875,67.675 14.875,68.125 15.55,68.8 L1.1
NetC5_2: C5.2 R5.2 U2.2 | length 6
  Top Layer w1: C5.2 3.825,53.175 U2.2@5.977,53.175 ; U2.2@8.55,53.175 11.55,53.175 R5.2
NetC7_1: C7.1 R7.1 U1.6 | length 6.6
  Top Layer w0.3: R7.1 8.475,57.925 C7.1 10.225,59.675 10.225,60.515 10.95,61.24 U1.6
NetC8_1: C8.1 R7.2 | length 1.5
  Top Layer w0.3: C8.1 R7.2
NetC9_2: C9.2 R10.2 | length 3.2
  Top Layer w1: R10.2 C9.2
NetC11_1: C11.1 R14.1 U4.6 | length 3.7
  Top Layer w0.3: U4.6 12.735,44.595 R14.1@13.35,43.98 ; C11.1 R14.1@13.35,43.98 ; R14.1 R14.1@13.35,43.98
NetC11_2: C11.2 D4.2 U4.8 | length 3.9
  Top Layer w0.5: D4.2 11.625,47.204 11.556,47.135 U4.8 12.066,47.135 12.221,46.98 C11.2
NetD1_1: D1.1 J1.1 R1.2 | length 13.7
  Top Layer w1: R1.2 5.95,78.6 11.514,78.6 12.1,78.014 12.1,76.6 J1.1
  Top Layer w2: J1.1 16.375,76.4 D1.1
NetD3_1: D3.1 Q2.1 Q3.1 R11.2 R13.2 | length 42.1
  Top Layer w1: D3.1 36.667,36.442 37.525,37.3 37.525,38.6 R11.2 42.8,38.625 43.15,38.975 ; R13.2 41.642,41.625 41.792,41.475 45.985,41.475 Q3.1@46.093,41.368
  Top Layer w1.5: Q3.1@46.093,41.368 45.543,41.368 43.15,38.975 43.15,22.911 44.029,22.032 46.093,22.032 Q2.1
NetD5_1: D5.1 Q4.1 Q5.1 R15.2 R16.2 | length 39.3
  Top Layer w0.8: v1(33.4,32.85) 33.4,31.332 35.575,29.157 D5.1
  Top Layer w1: D5.1@35.575,29.157 35.913,29.495 36.345,29.495 36.525,29.675 R16.2 38.575,29.775 R15.2
  Bottom Layer w1.5: Q4.1 27.875,31.1 27.875,32.8 ; Q5.1 24.307,46.468 26.279,46.468 27.875,44.871 27.875,32.8 ; v1@33.525,32.775 33.5,32.8 27.875,32.8
NetJ2_3: J2.3 R3.1 | length 3.3
  Top Layer w0.3: J2.3 3.85,23 R3.1
NetK1_2: K1.2 K2.2 Q2.3 Q3.3 Q4.2 Q5.2 R13.1 R14.2 | length 11.1
  Top Layer w1.5: R14.2 24.205,43.93 Q5.2
  Bottom Layer w1.5: Q2.3 47.85,27.075
NetK1_5: 
NetK2_5: 
NetLED1_1: LED1.1 R2.1 | length 2
  Top Layer w0.3: LED1.1 12.684,22.459 R2.1
NetNC_1: NC.1 Q1.1 | length 1.9
  Top Layer w0.5: Q1.1 NC.1
NetNC_2: NC.2 R1.1 R6.2 | length 3.1
  Top Layer w0.5: R6.2 2.3,77.95 3.8,77.95 R1.1 NC.2
NetQ4_3: Q4.3 Q5.3 R16.1 R17.2 | length 33.3
  Top Layer w0.5: Q4.3 31,22.375 33.725,25.1 35.4,25.1 R16.1
  Top Layer w2: 23.325,41.425 Q5.3
  Bottom Layer w0.5: v1(5.28,34.384) 16.759,34.384 v3(19.8,37.425)
NetQ6_1: Q6.1 R23.2 | length 1.8
  Top Layer w0.5: R23.2 Q6.1 ; R23.2@37.875,18.525 R23.2@37.975,18.425
NetQ7_1: Q7.1 R22.2 | length 1.7
  Top Layer w0.5: R22.2 Q7.1
NetR4_2: R4.2 R9.1 U1.5 | length 2.8
  Top Layer w0.3: R9.1@10.575,57.925 R9.1 11.1,59.05 11.1,59.762 11.308,59.97 U1.5
NetR8_2: R8.2 U1.4 | length 2.6
  Top Layer w0.3: R8.2 5.402,59.352 5.402,59.762 5.61,59.97 U1.4
NetR12_1: R12.1 U4.1 | length 2.5
  Top Layer w0.5: U4.1 6.425,47.135 6.5,47.21 R12.1
NetR17_1: R17.1 U5.3 | length 5.5
  Top Layer w0.4: R17.1 3.03,35.134 3.03,36.683 3.206,36.859 4.205,36.859 4.806,36.859 5.057,37.11 U5.3
NetR18_1: R18.1 R20.2 U5.1 | length 4.5
  Top Layer w0.5: U5.1 5.775,39.725 6.35,39.725 6.88,40.255 R18.1 R20.2
NetR20_1: R20.1 R21.2 U5.2 | length 8
  Top Layer w0.5: R21.2 3.827,37.609 3.98,37.762 4.587,37.762 5.096,38.271 5.096,38.311 5.166,38.38 U5.2 5.729,38.409 6.855,38.409 R20.1
NetU1_3: U1.3 UVLO1.1 UVLO2.2 | length 7
  Top Layer w0.3: UVLO2.2 3.35,59.25 4.399,59.25 4.725,59.576 4.725,60.615 5.35,61.24 U1.3
  Top Layer w0.5: UVLO1.1 2.3,61.8 2.3,60.3 UVLO2.2
OCP/TX: J3.3 U3.2 | length 31.6
  Bottom Layer w0.3: v1@7.3,31.35 8.55,31.35 9.85,30.05 J3.3@9.85,1.575
  other v1: 7.25,31.35
PLC: U3.11
RST: J4.4 U3.4 | length 30.8
  Top Layer w0.3: J4.4 9.35,11.175 9.35,29.375 8.675,30.05 U3.4
RX: J3.2 U3.3 | length 32.3
  Top Layer w0.3: U3.3 8.875,30.7 9.85,29.725 9.85,21.275 12.35,18.775 J3.2@12.35,1.575
SCL: J4.3 Q1.3 U3.18 | length 87.3
  Top Layer w0.3: Q1.3 0.525,68.525 0.525,42.876 0.701,42.7 5.775,42.7 6.046,42.429 6.046,42.221 6.08,42.188 6.08,41.081 5.934,40.934 5.406,40.934 4.55,40.079 4.55,38.825 4.125,38.4 2.826,38.4 2.58,38.154 2.58,34.095 3.975,32.7 8.375,32.7 10.375,30.7 U3.18
  Bottom Layer w0.3: J4.3 5.975,10.3 5.975,32.35 v1(5.675,32.65)
SDA: J4.2 U3.8 | length 23.4
  Top Layer w0.3: J4.2 4.475,9.025 8.5,13.05 8.5,26.974 8.074,27.4 7.225,27.4 U3.8
SW: SW1.2 U3.12 | length 11
  Top Layer w0.3: U3.12 13.025,26.75 14.1,26.75 14.8,26.05 SW1.2
V_Bat: C3.1 C4.1 D1.2 D6.2 D7.2 K1.1 K1.3 K2.1 K2.3 P1.1 Q2.2 Q3.2 U1.2 UVLO1.2 | length 88.9
  Top Layer w0.5: C4.1 3.975,63.125 4.3,63.125 4.867,62.558 5.827,62.558 U1.2
  Top Layer w1: C4.1 3.703,63.397 2.347,63.397 UVLO1.2 2.15,63.45 2.15,68.539 2.736,69.125 4.4,69.125 6.77,71.495 D1.2
  Top Layer w1.5: P1.1@35.35,69.975 40.15,69.975 44.35,69.975 P1.1@49.15,69.975 ; Q2.2 Q2.2@46.207,24.468 ; Q3.2 Q3.2@46.207,43.918
  Top Layer w2: D1.2 24.63,71.495 C3.1 29.615,70.975 30.615,69.975 P1.1@35.35,69.975
  Top Layer w3: K1.3 K1.1 ; K2.3 K2.1
  Bottom Layer w3: K1.1 K1.3 62.55,15.925 65.958,15.925 D6.2 ; K2.1 K2.3 65.25,69.4 69.042,69.4 D7.2
V_DET: U3.14
VDD: C6.2 C12.1 J2.6 J3.1 J4.1 R2.2 R3.2 U2.3 U3.9 U5.8 | length 122.9
  Top Layer w0.3: C6.2 3.375,51.675 U2.3 ; U3.9 5.625,26.8 C12.1 5.05,26.225 R3.2 6.075,24.5 6.7,23.875 6.7,21.35 J2.6 2.35,11.675 J4.1 0.825,10.15 0.825,2.775 4.2,2.775 6.525,0.45 13.325,0.45 13.9,1.025 13.975,1.025 14.688,1.738 14.85,1.575 J3.1@14.549,1.274 ; R2.2 13.925,23.3 13.925,17.951 13.075,17.101 13.075,3.35 14.65,1.775 14.725,1.775 J3.1
  Bottom Layer w0.3: J2.6 0.625,18.725 0.625,33.55 0.597,33.578 0.597,37.975 2.247,39.625 v1(11.475,39.625) 9.075,42.025 9.075,45.05 v1(2.425,51.7)
pads on no net: SW1.1 SW1.3 U3.10 U5.5 U5.6 U5.7

## Polygon pours and split planes (outlines as drawn)
GND on Top Layer "gm" (solid, remove dead copper, pour order 3): 0.05,80.475 0.15,80.375 0.15,-0.025 80.15,-0.025 80.25,-0.125 80.25,80.375 80.15,80.475
GND on Bottom Layer "GND_L02_P007" (solid, remove dead copper, pour order 7): 0.15,-0.025 0.45,-0.325 80.15,-0.325 80.15,80.375 0.15,80.375

## Keep-outs
Keep-Out Layer:
  the board outline again, w0.254

## Other copper
Top Layer:
  region net V_Bat: 59.2,64.425 59.2,61.05 59.2,25.95 54.6,21.35 49.675,21.35 48.975,22.05 48.975,68.125 62.9,68.125
  region net V_Bat: 50.65,25.575 56.35,19.875 56.35,18.55 65.45,18.55 65.45,13.775 49.35,13.775 49.35,21.275 47.05,23.575 45.15,23.575 44.95,23.775 44.95,25.575
  region net M1: 57.721,1.625 78.55,1.625 78.55,50.7 78.35,50.9 74.9,50.9 73.5,49.5 73.5,31.375 68.4,26.275 68.4,8.297 59.288,8.297 57.729,7.229
  region net M2: 78.225,71.75 70.8,71.75 70.75,71.8 70.45,71.5 70.45,61.975 62.575,61.975 60.55,59.95 60.55,54.675 62.575,52.65 62.575,34.425 67.725,34.425 72.425,34.425 72.425,52.65 78.45,52.65 78.45,71.6 78.375,71.675
  region net VDD: 2.75,52.125 2.45,52.425 2.45,53.35 2.375,53.425 1.625,53.425 1.5,53.3 1.5,51.775 2.2,51.075 6.875,51.075 6.875,51.975 6.725,52.125
  region net NetQ4_3: 20.2,42.45 18.05,40.3 18.05,22.25 19.225,21.075 25.524,21.075 25.525,21.625 25.525,23.35 23.075,23.35 23.025,23.3 22.65,23.675 22.65,39.25 23.825,40.425 24.65,40.425 25.175,40.95 25.175,41.95 24.675,42.45 24,42.45
  region net 15V: 11.5,54.625 11.4,54.725 11.4,57.2 13.025,57.2 13.6,57.775 18.35,57.775 18.35,56.38 15.325,56.45 13.5,54.625
  region net NetR4_2: 11.475,59.97 12.325,59.12 12.325,57.65 9.8,57.65 9.8,58.258 11.238,60.375 12.25,60.375 12.5,60.125 12.5,57.825 12.348,57.673
  region net 15V: 13.55,63.875 13.55,58.7 13.55,57.75 14.05,57.75 14.075,57.775 18.35,57.775 18.35,64.022
  region net NetK1_2: 44.65,42.675 44.65,45.475 46.8,45.475 47.35,46.025 47.35,47.475 47.15,47.675 27.75,47.675 25.35,45.275 23.35,45.275 22.95,44.875 22.95,43.675 23.95,42.675
  region net NetK1_2: 23.35,24.1 31.1,24.1 32.75,25.75 32.75,45.275 23.35,45.275 22.95,44.875 22.95,43.675 23.95,42.675 25.15,42.675 26.1,41.725 26.1,27.125 24.95,25.975 23.35,25.975
  region net V_Bat: 48.05,25.575 48.05,26.075 49.3,27.325 49.45,27.175 49.45,25.575
  region net V_Bat: 47.75,43.075 47.75,42.575 49.1,41.225 49.15,41.275 49.15,43.075
  region net V_Bat: 47.75,44.975 47.75,45.475 49,46.725 49.15,46.575 49.15,44.975
  region net V_Bat: 45.15,44.975 56.35,44.975 56.35,42.475 55.85,42.975 45.15,42.975
  region net V_Bat: 49.35,72.175 49.35,42.004 49.35,13.775 56.275,13.775 56.275,70.55 54.65,72.175
  region net V_Bat: 32.85,71.975 66.75,71.975 66.75,67.25 33.675,67.25 32.85,68.075
Bottom Layer:
  region net NetK1_2: 23.15,23.675 44.471,23.675 45.05,25.875 48.65,25.875 48.85,26.075 48.85,27.925 48.85,31.175 30.25,31.175 25.05,25.975 23.15,25.975
  region net NetK1_2: 45.05,45.575 45.05,66.975 51.65,66.975 51.65,77.475 62.65,77.475 62.65,73 56.55,73 56.55,45.575
  region net NetK1_2: 52.05,68.075 59.85,68.075 59.85,17.875 56.85,17.875 48.25,26.475 48.25,44.775 47.45,45.575 45.05,45.575 45.05,47.375
  region net NetK1_2: 52.65,28.075 60.05,20.675 60.05,17.675 56.55,17.675 48.05,26.175 44.75,26.175 44.75,28.075

## Silkscreen, mask and mechanical layers (free items; w line width, h text height)
Top Overlay:
  lines w0.254: 1.7,74.675 2.4,75.375 1.75,75.375 ; 2.475,74.875 2.475,75.35 ; 11.6,59.4 12.3,59.4 ; 11.625,60.275 11.625,59.425 12.525,60.325 13.05,60.325 13.975,59.4 13.975,52.625 ; 26.275,52.675 26.275,50.325 26,50.05 14,50.05 13.875,50.175 13.875,52.375 14.325,52.825 26.325,52.825
  lines w1: 26.35,34.475 28.05,34.475 ; 26.45,43.975 27.75,43.975 ; 26.55,24.875 28.15,24.875 ; 42.15,24.875 43.75,24.875 ; 42.25,34.475 43.95,34.475 ; 42.55,43.975 43.85,43.975
  lines w2.2: 22.369,4.875 22.369,15.875 ; 22.48,4.864 33.48,4.864 ; 22.769,54.075 22.769,65.012 33.788,65.012 ; 28.15,4.975 28.15,64.975 ; 33.569,5.175 33.569,16.175 ; 33.869,53.875 33.869,64.875 ; 36.431,53.875 36.431,64.875 ; 36.512,65.012 47.531,65.012 47.531,54.075 ; 36.731,5.175 36.731,16.175 ; 36.82,4.864 47.82,4.864 ; 42.15,4.975 42.15,64.975 ; 47.931,4.875 47.931,15.875
  text "PD" at 61.096,31.125 h2.5 r90
  text "Dec 23 2021" at 58.226,31.023 h2.5 r90
  text "36V Controller V2.0" at 55.238,30.925 h2.5 r90
Bottom Overlay:
  drawing of 399 lines, arcs and shapes, not listed
  text "RF 36V Controller V2.0" at 55.313,54.075 h2.5 r90
  text "Dec 23 2021" at 58.301,53.977 h2.5 r90
  text "RADIOFLYER" at 51.723,53.875 h4 r90
  text "PD" at 61.171,53.875 h2.5 r90
  text "VDD" at 2.721,15.521 h0.8 r90
  text "GND" at 5.796,1.104 h0.8

## Text inside footprints (layer, text, board x,y; h text height)
J1: Top Overlay "2" at 8.974,77.746 h0.89; Top Overlay "1" at 11.818,77.67 h0.89; Bottom Overlay "2" at 8.212,75.917 h0.89; Bottom Overlay "1" at 13.393,76.044 h0.89
J2: Top Overlay "1" at 3.9,30.75 h0.89 r90; Top Overlay "6" at 3.9,15.325 h0.89 r90
J3: Top Overlay "1" at 14.743,3.145 h0.89; Top Overlay "4" at 6.808,3.145 h0.89; Bottom Overlay "1" at 16.45,2.05 h0.89; Bottom Overlay "4" at 6,2.375 h0.89
J4: Top Overlay "5" at 2.505,-1.832 h0.89 r90; Top Overlay "1" at 2.632,14.247 h0.89 r90; Bottom Overlay "5" at 2.708,0.226 h0.89 r90; Bottom Overlay "1" at 2.556,13.018 h0.89 r90
K1: Top Overlay "Coil" at 54.55,10.626 h0.6 r90; Top Overlay "Coil" at 54.55,14.576 h0.6 r90; Bottom Overlay "NO" at 62.85,27.9 h0.6 r90; Bottom Overlay "NC" at 59.025,27.85 h0.6 r90; Bottom Overlay "COM" at 77.125,17.85 h0.6 r90; Bottom Overlay "COM" at 77.075,9.525 h0.6 r90; Bottom Overlay "COM" at 60.05,-0.225 h0.6 r90
K2: Top Overlay "Coil" at 57.15,67.951 h0.6 r90; Top Overlay "Coil" at 57.15,64.001 h0.6 r90; Bottom Overlay "COM" at 62.65,53.15 h0.6 r90; Bottom Overlay "COM" at 79.675,62.9 h0.6 r90; Bottom Overlay "COM" at 79.725,71.225 h0.6 r90; Bottom Overlay "NC" at 61.6,81.45 h0.6 r90; Bottom Overlay "NO" at 65.45,81.275 h0.6 r90